# EAGLE board SENTRY Board PCB (EAGLE 9.7.0)
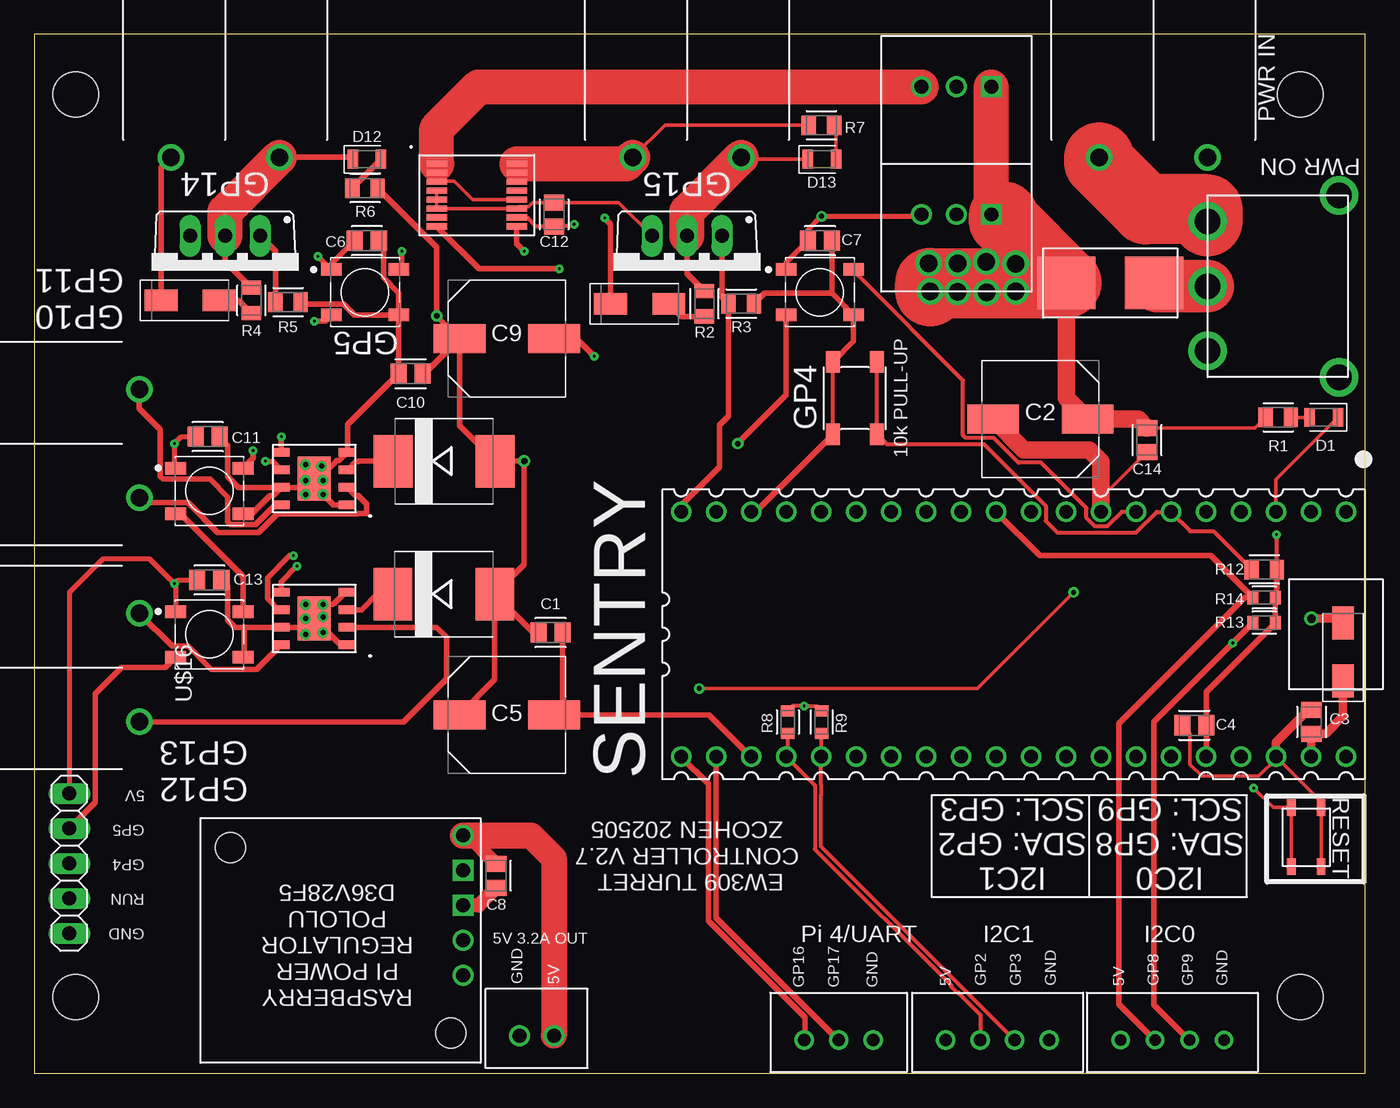
[diagram p0: board, top side]
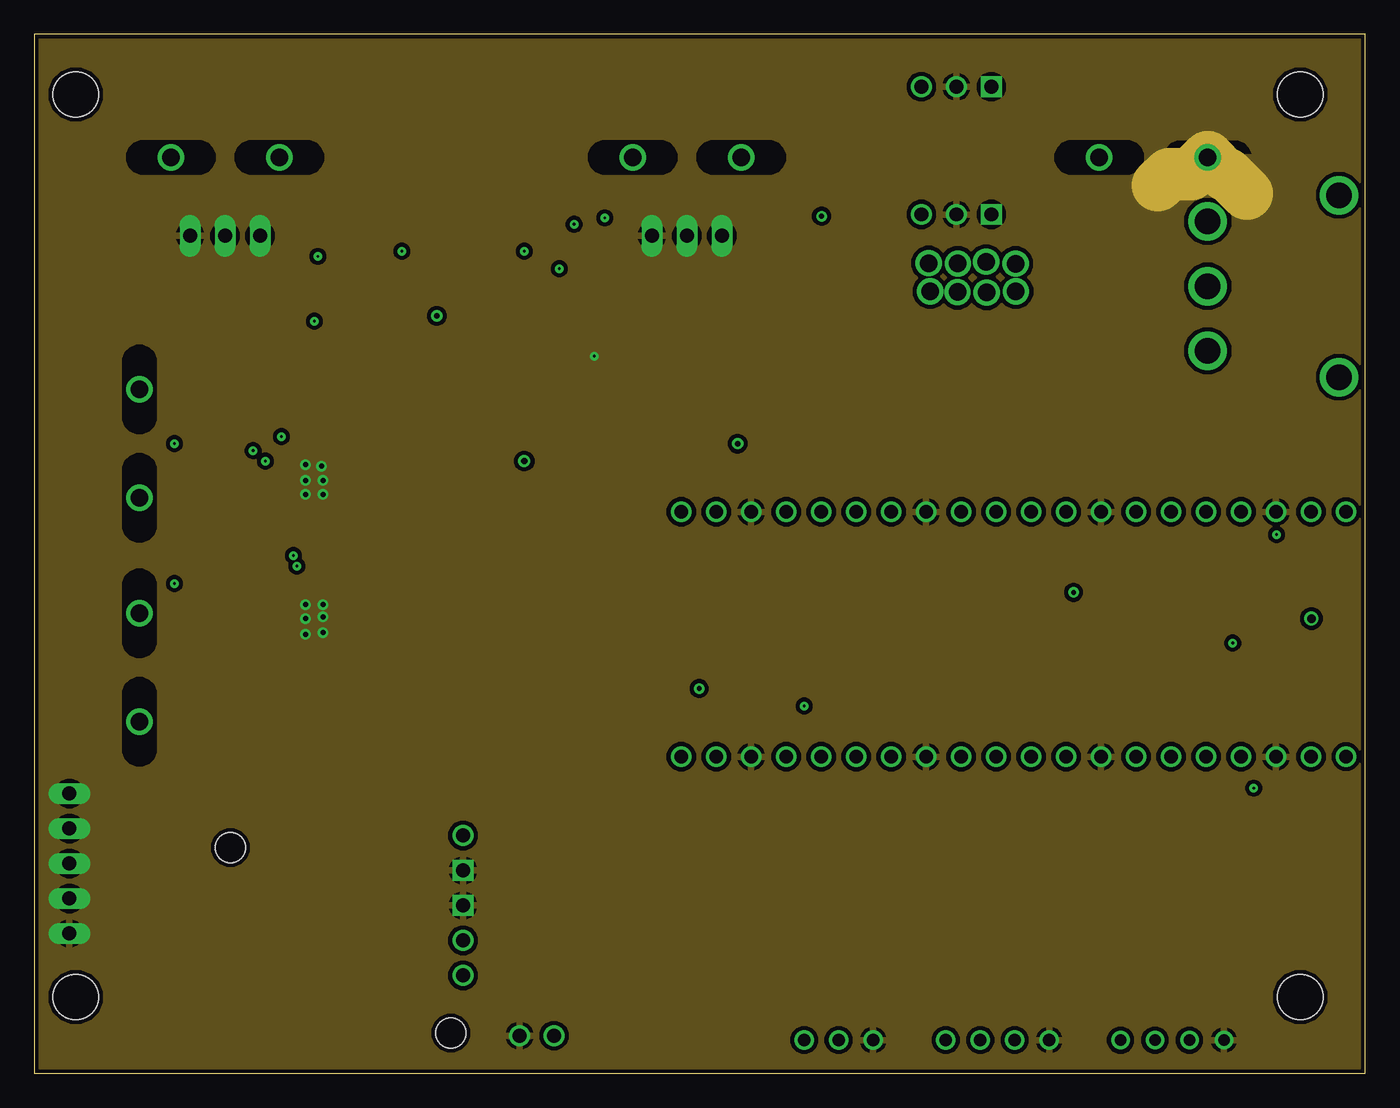
[diagram p1: board, inner layer GROUND PLANE]
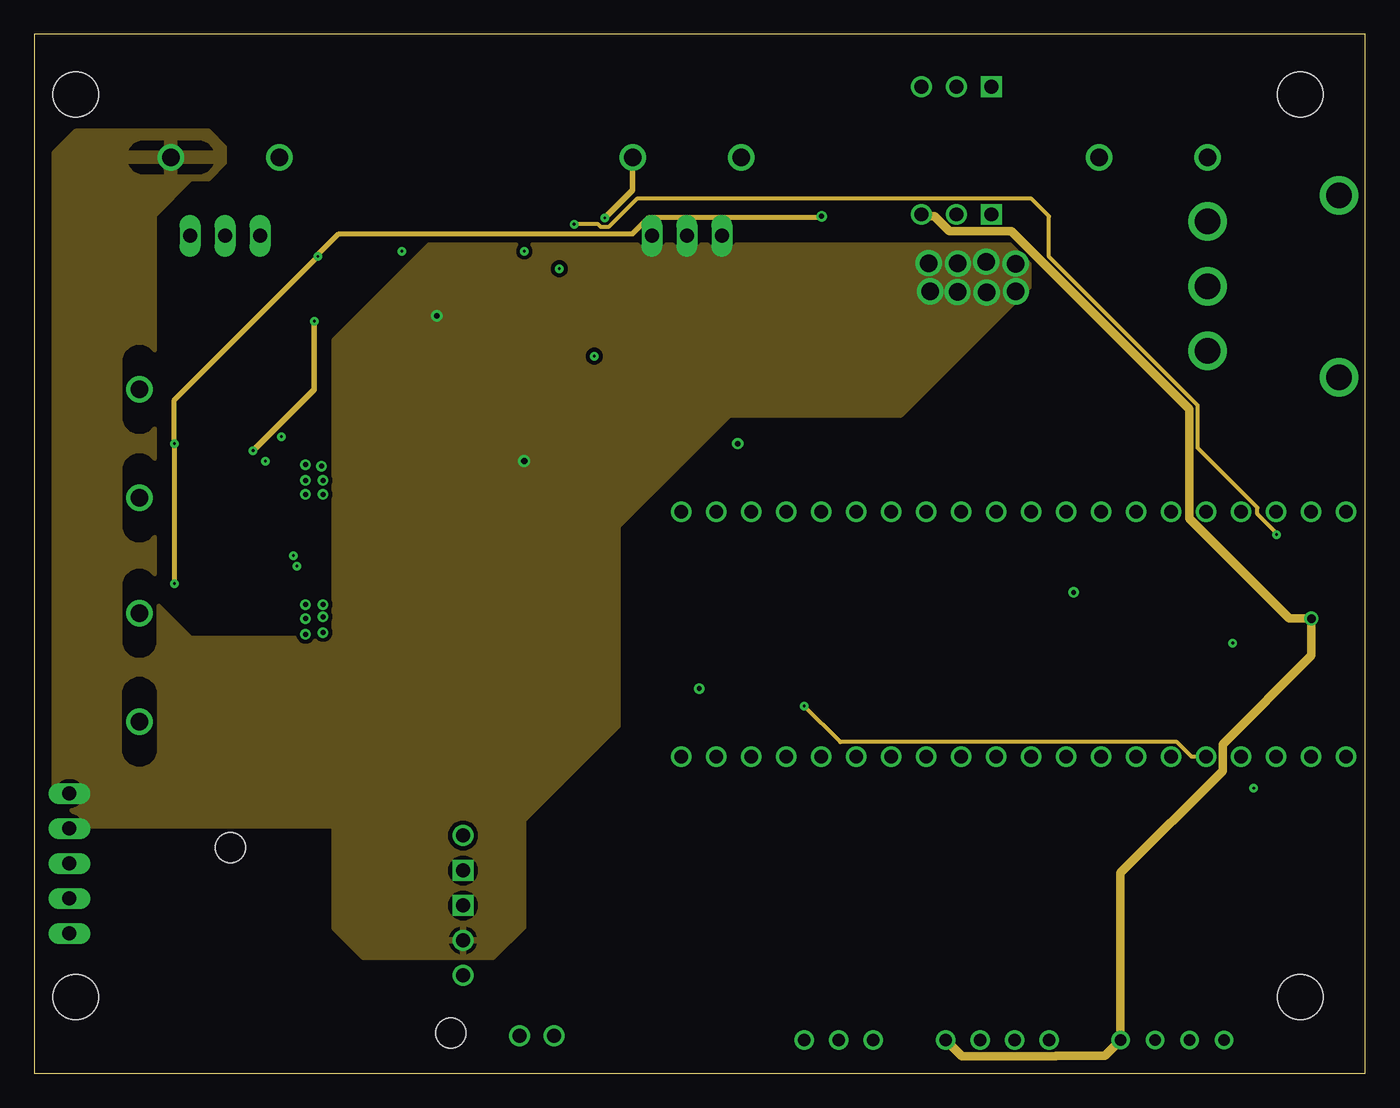
[diagram p2: board, inner layer POWER PLANE]
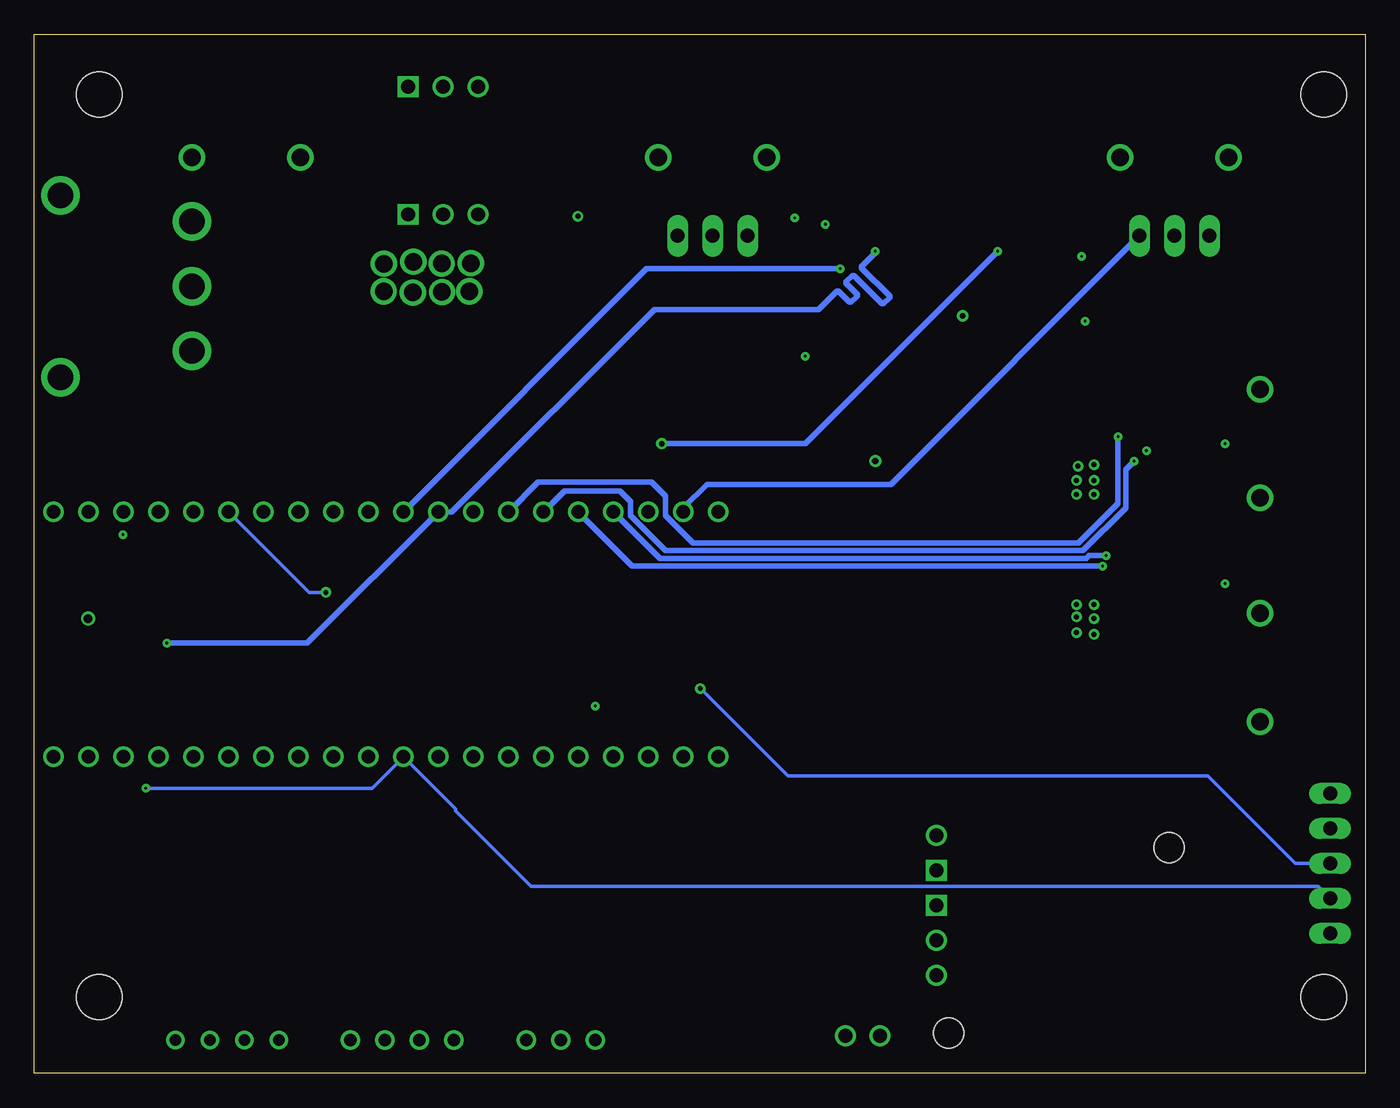
[diagram p3: board, bottom side, seen from below]

Size 96.6 x 75.43 mm. Coordinates in mm from the lower left corner, seen from the top.
Outline: 0,0 96.6,0 96.6,75.43 0,75.43 0,0
Copper layers (1+2*15+16): Top / GROUND PLANE / POWER PLANE / Bottom
Stack-up 4 Layer Stack: Top SilkScreen Epoxy Ink / Top SolderMask SR:Green 0.0254mm Dk 4.3 / Top Surface Finish Lead-Free 0.02mm / Top CuFoil:007 0.035mm / Dielectric-1 Prepreg:001 0.064mm / Dielectric-2 Prepreg:001 0.064mm / GROUND PLANE CuFoil:007 0.035mm / Dielectric-3 Core:066 0.711mm / POWER PLANE CuFoil:007 0.035mm / Dielectric-4 Prepreg:001 0.064mm / Dielectric-5 Prepreg:001 0.064mm / Bottom CuFoil:007 0.035mm / Bottom Surface Finish Lead-Free 0.02mm / Bottom SolderMask SR:Green 0.0254mm Dk 4.3 / Bottom SilkScreen Epoxy Ink
Design rules: minimum copper width 4mil, minimum drill size 6mil, copper clearance wire_polygon to wire_polygon 4mil, copper clearance wire_polygon to pad_smd 4mil, copper clearance wire_polygon to via 8mil, copper clearance pad_smd to pad_smd 6mil, copper clearance pad_smd to via 4mil, copper clearance via to via 4mil, copper clearance smd to pad (same net) 4mil, copper clearance smd to via (same net) 4mil, copper clearance smd to smd (same net) 6mil, dimension clearance 8mil, via restrict clearance 0mil, restrict clearance 0mil, drill distance 8mil, keepout clearance 0mil
Holes 3.3 mm at 91.89,71.07 91.89,5.54 3,5.54 3,71.07

## Footprints (pad centres in the part's own frame; a part is rotated, then mirrored left to right if it is on the bottom)
CAPC2012X110 = smd 1.165 x 1.465: 1 -0.875,0; 2 0.875,0
CAPAE830X1050N = smd 3.764 x 2.115: 1 -3.426,0; 2 3.426,0
LEDC2012X110N_FLAT-R = smd 0.762 x 1.362: A 1.025,0; C -1.025,0
DIOM5226X290N = smd 2.392 x 1.565: 1 -2.108,0; 2 2.108,0
WS2812B = smd 1.5 x 0.9: 1 -2.45,1.65; 2 -2.45,-1.65; 3 2.45,-1.65; 4 2.45,1.65
SMC = smd 2.8 x 3.8: A 3.7,0; C -3.7,0
LEDC2012X110N_FLAT-G = smd 0.762 x 1.362: A 1.025,0; C -1.025,0
LEDC2012X110N_FLAT-B = smd 0.762 x 1.362: A 1.025,0; C -1.025,0
B4B-XH-A = drill 0.9: 1 0,0; 2 2.5,0; 3 5,0; 4 7.5,0
B4B-XH-A' = drill 0.84: 1 0,0; 2 2.5,0; 3 5,0; 4 7.5,0
B2B-XH-A = drill 1: 1 0,0; 2 2.5,0
1X05 = drill 1.016 long: 1 -5.08,0; 2 -2.54,0; 3 0,0; 4 2.54,0; 5 5.08,0
B3B-XH-A = drill 0.9: 1 0,0; 2 2.5,0; 3 5,0
TO220BV = drill 1.016 long: D 0,-2.54; G -2.54,-2.54; S 2.54,-2.54
RESC2012X65 = smd 1.031 x 1.42: 1 -0.919,0; 2 0.919,0
RESC1608X60 = smd 0.799 x 0.974: 1 -0.815,0; 2 0.815,0
PICO-PKG-TH = drill 1: 1 -8.89,24.13; 2 -8.89,21.59; 3 -8.89,19.05; 4 -8.89,16.51; 5 -8.89,13.97; 6 -8.89,11.43; 7 -8.89,8.89; 8 -8.89,6.35; 9 -8.89,3.81; 10 -8.89,1.27; 11 -8.89,-1.27; 12 -8.89,-3.81; 13 -8.89,-6.35; 14 -8.89,-8.89; 15 -8.89,-11.43; 16 -8.89,-13.97; 17 -8.89,-16.51; 18 -8.89,-19.05; 19 -8.89,-21.59; 20 -8.89,-24.13; 21 8.89,-24.13; 22 8.89,-21.59; 23 8.89,-19.05; 24 8.89,-16.51; 25 8.89,-13.97; 26 8.89,-11.43; 27 8.89,-8.89; 28 8.89,-6.35; 29 8.89,-3.81; 30 8.89,-1.27; 31 8.89,1.27; 32 8.89,3.81; 33 8.89,6.35; 34 8.89,8.89; 35 8.89,11.43; 36 8.89,13.97; 37 8.89,16.51; 38 8.89,19.05; 39 8.89,21.59; 40 8.89,24.13
ANDERSONBOARDCONNECTOR = drill 1.27 slot 5.232: GND 3.937,0; PWR -3.937,0
154_OMNI_BLOK_FUSE_HOLDER = smd 4.242 x 3.81: P$1 -3.188,0; P$2 3.188,0
OKI-78SRVERT = drill 1: GND 0,0; OUT 2.54,0 | drill 1 square: IN -2.54,0
DX36V28FX = drill 1.016: EN 6.35,1.27; IN 8.89,1.27; OUT 16.51,1.27 | drill 1.016 square: GND1 13.97,1.27; GND2 11.43,1.27 | hole 2.184: 15.621,18.161; 2.159,2.159
BD62120AEFJ = smd 1.27 x 0.635: P$1 -2.41,1.905; P$2 -2.41,0.635; P$3 -2.41,-0.635; P$4 -2.41,-1.905; P$5 2.41,-1.905; P$6 2.41,-0.635; P$7 2.41,0.635; P$8 2.41,1.905 | smd 2.4 x 3.2: P$9 0,0
SN50SMTR2SWITCH = smd 1.55 x 1: P$1 -2.625,1.6; P$2 -2.625,-1.6; P$3 2.625,1.6; P$4 2.625,-1.6
INA260 = smd 1.5 x 0.45: P$1 -2.54,2.54; P$2 -2.54,1.89; P$3 -2.54,1.24; P$4 -2.54,0.59; P$5 -2.54,-0.06; P$6 -2.54,-0.71; P$7 -2.54,-1.36; P$8 -2.54,-2.01; P$9 3.26,-2.01; P$10 3.26,-1.36; P$11 3.26,-0.71; P$12 3.26,-0.06; P$13 3.26,0.59; P$14 3.26,1.24; P$15 3.26,1.89; P$16 3.26,2.54
TACTILE_SWITCH = smd 1.2 x 0.65: P$1 -2.15,1.075; P$2 -2.15,-1.075; P$3 2.15,1.075; P$4 2.15,-1.075
500SSP3S1M6QEA_SWITCH = drill 1.854: P$1 0,4.699; P$2 0,0; P$3 0,-4.699; P$4 -9.525,-6.604; P$5 -9.525,6.604

## Placement (x,y rotation side)
C1  .1uF  [CAPC2012X110]  37.47,32 0 top
C2  100uF  [CAPAE830X1050N]  73.03,47.5 180 top
C3  1uF  [CAPC2012X110]  92.71,25.52 90 top
C4  .1uF  [CAPC2012X110]  84.2,25.27 180 top
C5  100uF  [CAPAE830X1050N]  34.29,26.04 0 top
C6  .1uF  [CAPC2012X110]  24.13,60.45 0 top
C7  .1uF  [CAPC2012X110]  57.02,60.45 0 top
C8  1uF  [CAPC2012X110]  33.53,14.35 270 top
C9  100uF  [CAPAE830X1050N]  34.29,53.34 0 top
C10  .1uF  [CAPC2012X110]  27.3,50.8 180 top
C11  .1uF  [CAPC2012X110]  12.57,46.23 0 top
C12  .1uF  [CAPC2012X110]  37.72,62.36 90 top
C13  .1uF  [CAPC2012X110]  12.7,35.81 0 top
C14  10uF  [CAPC2012X110]  80.77,45.97 270 top
D1  LED_RED  [LEDC2012X110N_FLAT-R]  93.6,47.62 180 top
D2  DIODE  [DIOM5226X290N]  43.94,55.88 0 top
D3  DIODE  [DIOM5226X290N]  11.3,56.12 0 top
D4  WS2812B  [WS2812B]  12.7,42.29 0 top
D5  WS2812B  [WS2812B]  12.7,31.88 0 top
D6  [SMC]  29.74,44.45 0 top
D7  [SMC]  29.72,34.8 0 top
D8  DIODE  [DIOM5226X290N]  95,30.61 90 top
D12  LED_GREEN  [LEDC2012X110N_FLAT-G]  24.13,66.36 0 top
D13  LED_BLUE  [LEDC2012X110N_FLAT-B]  57.16,66.36 0 top
D14  WS2812B  [WS2812B]  57.02,56.71 0 top
D15  WS2812B  [WS2812B]  24,56.71 0 top
I2C  B4B-XH-A  [B4B-XH-A]  66.17,2.41 0 top
I2C0  B4B-XH-A  [B4B-XH-A']  78.85,2.41 0 top
J1  JST-XH-2PIN  [B2B-XH-A]  37.72,2.74 180 top
JP1  PINHD-1X5  [1X05]  2.54,15.24 270 top
PI  B3B-XH-A  [B3B-XH-A]  55.88,2.41 0 top
Q1  NMOSFET  [TO220BV]  47.37,58.27 180 top
Q2  NMOSFET  [TO220BV]  13.84,58.27 180 top
R1  1K  [RESC2012X65]  90.3,47.62 180 top
R2  10K  [RESC2012X65]  48.64,55.88 270 top
R3  10K  [RESC2012X65]  51.31,55.88 180 top
R4  10K  [RESC2012X65]  15.75,56.12 270 top
R5  10K  [RESC2012X65]  18.41,55.99 180 top
R6  1K  [RESC2012X65]  24,64.26 0 top
R7  1K  [RESC2012X65]  57.13,68.83 180 top
R8  4k7  [RESC1608X60]  54.69,25.5 90 top
R9  4k7  [RESC1608X60]  57.15,25.5 90 top
R12  10K  [RESC2012X65]  89.28,36.58 0 top
R13  4k7  [RESC1608X60]  89.28,32.72 0 top
R14  4k7  [RESC1608X60]  89.28,34.54 0 top
U1  RASPBERRY_PICOTH  [PICO-PKG-TH]  71.08,31.88 270 top
U$1  ANDERSONBOARDCONNECTORHORIZONTAL  [ANDERSONBOARDCONNECTOR]  81.24,66.5 0 top
U$2  5A  [154_OMNI_BLOK_FUSE_HOLDER]  78.11,57.38 0 top
U$3  OKI-78SRVERTICAL  [OKI-78SRVERT]  66.93,62.36 180 top
U$4  ANDERSONBOARDCONNECTORHORIZONTAL  [ANDERSONBOARDCONNECTOR]  47.37,66.5 0 top
U$5  ANDERSONBOARDCONNECTORHORIZONTAL  [ANDERSONBOARDCONNECTOR]  13.84,66.5 0 top
U$7  DX36V28FX  [DX36V28FX]  32.38,0.76 90 top
U$8  OKI-78SRVERTICAL  [OKI-78SRVERT]  66.93,71.63 180 top
U$9  BD62120AEFJ  [BD62120AEFJ]  20.32,33.02 180 top
U$10  SN50SMTR2SWITCH  [SN50SMTR2SWITCH]  59.56,49.02 90 top
U$11  BD62120AEFJ  [BD62120AEFJ]  20.32,43.18 180 top
U$12  INA260  [INA260]  31.75,63.5 0 top
U$13  TACTILE_SWITCH  [TACTILE_SWITCH]  92.33,17.14 270 top
U$14  500SSP3S1M6QEA_SWITCH  [500SSP3S1M6QEA_SWITCH]  85.18,57.15 180 top
U$15  ANDERSONBOARDCONNECTORHORIZONTAL  [ANDERSONBOARDCONNECTOR]  7.62,45.72 90 top
U$16  ANDERSONBOARDCONNECTORHORIZONTAL  [ANDERSONBOARDCONNECTOR]  7.62,29.46 90 top

## Library data of the parts
C1 C4 C6 C7 C10-C14 = Capacitor; CATEGORY: Capacitor; PACKAGE_SIZE: 0805; PACKAGE_TYPE: SMD; SUBCATEGORY: Ceramic Capacitors; TYPE: MLCC
C2 C5 C9 = Capacitor; CATEGORY: Capacitor; PACKAGE_SIZE: 8.5MM; PACKAGE_TYPE: SMD; SUBCATEGORY: Aluminum Electrolytic Capacitors; TYPE: Radial Can
C3 C8 = Capacitor; CATEGORY: Capacitor
D1 = LED; CATEGORY: LED; COLOR: RED; DESCRIPTION: CHIP LED FLAT; SUB-CATEGORY: CHIP; TYPE: FLAT_TOP
D2 D3 D8 = Diode; CATEGORY: Diode; SUB-CATEGORY: Rectifier
D4 D5 D14 D15 = LED; CATEGORY: LED; COLOR: RGB; DESCRIPTION: LED integrated light source; MANUFACTURER: Worldsemi; MPN: WS2812B; OPERATING_TEMP: -25 ℃ to +80℃(TJ); PART_STATUS: Active; SUB_CATEGORY: RGB
D6 D7 = diode
D12 = LED; CATEGORY: LED; COLOR: GREEN; DESCRIPTION: CHIP LED FLAT; SUB-CATEGORY: CHIP; TYPE: FLAT_TOP
D13 = LED; CATEGORY: LED; COLOR: BLUE; DESCRIPTION: CHIP LED FLAT; SUB-CATEGORY: CHIP; TYPE: FLAT_TOP
I2C = Connector; CATEGORY: Connectors; DATASHEET: https://www.jst-mfg.com/product/pdf/eng/eXH.pdf; DESCRIPTION: Connector Header Through Hole 4 position 0.098" (2.50mm); MANUFACTURER: JST Sales America Inc.; MPN: B4B-XH-A; OPERATING_TEMPERATURE: -25°C ~ 85°C; PACKAGE_SIZE: NA; PACKAGE_TYPE: Through Hole; PART_STATUS: Active; PITCH: 0.098" (2.50mm); ROHS: Compliant; SERIES: XH; SUBCATEGORY: Rectangular Connectors; TYPE: Male Headers
I2C0 = Connector; CATEGORY: Header; DSECRIPTION: Connector Header Through Hole 4 position 0.098" (2.50mm); MANUFACTURER: JST Sales America Inc.; MPN: B4B-XH-A(LF)(SN); OPERATING_TEMPERATURE: -25 C to 85 C; PART_STATUS: ACTIVE; PITCH: 0.098" (2.50mm); ROHS_COMPLIANCE: ROHS3 Compliant; SERIES: XH; SUB_CATEGORY: Rectangular Connectors; TYPE: Header, Male Pin, Board to Cable/Wire, Through Hole
J1 = Connector; CATEGORY: Connectors; DATASHEET: https://www.jst-mfg.com/product/pdf/eng/eXH.pdf; DESCRIPTION: Connector Header Through Hole 2 position 0.098" (2.50mm); MANUFACTURER: JST Sales America Inc.; MPN: B2B-XH-A; OPERATING_TEMPERATURE: -25°C ~ 85°C; PACKAGE_SIZE: NA; PACKAGE_TYPE: Through Hole; PART_STATUS: Active; PITCH: 0.098" (2.50mm); ROHS: Compliant; SERIES: XH; SUBCATEGORY: Rectangular Connectors; TYPE: Male Headers
JP1 = Connector; CATEGORY: Connectors; DESCRIPTION: Header-Straight-5 Position; PACKAGE_TYPE: Through Hole; PITCH: 0.100" (2.54mm); SUBCATEGORY: Headers; TYPE: Male Pins
PI = Connector; CATEGORY: Connectors; DATASHEET: https://www.jst-mfg.com/product/pdf/eng/eXH.pdf; DESCRIPTION: Connector Header Through Hole 3 position 0.098" (2.50mm); MANUFACTURER: JST Sales America Inc.; MPN: B3B-XH-A; OPERATING_TEMPERATURE: -25°C ~ 85°C; PACKAGE_SIZE: NA; PACKAGE_TYPE: Through Hole; PART_STATUS: Active; PITCH: 0.098" (2.50mm); ROHS: Compliant; SERIES: XH; SUBCATEGORY: Rectangular Connectors; TYPE: Male Headers
Q1 Q2 = Transistor; CATEGORY: Transistor; SUB-CATEGORY: MOSFET; TYPE: N-Channel
R1-R7 R12 = Resistor; CATEGORY: Resistors; DESCRIPTION: Chip Resistor 2.00 X 1.25 X 0.65 mm body 0805(2012-METRIC) Package; PACKAGE_SIZE: 0805; PACKAGE_TYPE: SMD
R8 R9 R13 R14 = Resistor; CATEGORY: Resistors; DESCRIPTION: Chip Resistor 1.60 X 0.82 X 0.60 mm body 0603(1608-METRIC) Package; PACKAGE_SIZE: 0603; PACKAGE_TYPE: SMD
U1 U$1-U$5 U$7-U$16 = CohenLibrary

## Nets
11: U$14.P$1
+3.3V [PWRLOW]: C4.1 C12.1 R8.2 R9.2 R12.2 R13.2 R14.2 U1.36 U$12.P$10
+5V [PWRLOW]: C6.1 C7.1 C11.1 C13.1 D4.1 D5.1 D8.2 D14.1 D15.1 I2C0.1 I2C.1 JP1.1 U$3.OUT
+5V_RPI: C8.1 J1.1 U$7.OUT
+5VMOT [PWR]: U$8.OUT U$12.P$1 U$12.P$2 U$12.P$3 U$12.P$12
+12V [PWR]: C1.1 C2.1 C5.1 C9.1 C10.1 C14.1 D3.1 D6.A D7.A R1.2 R6.2 U$2.P$1 U$3.IN U$5.PWR U$7.IN U$8.IN
DOUT: D5.2 JP1.2
GND [GND]: C1.2 C2.2 C3.2 C4.2 C5.2 C6.2 C7.2 C8.2 C9.2 C10.2 C11.2 C12.2 C13.2 C14.2 D1.C D4.3 D5.3 D14.3 D15.3 I2C0.4 I2C.4 J1.2 JP1.5 PI.3 Q1.S Q2.S R3.1 R5.1 U1.3 U1.8 U1.13 U1.18 U1.23 U1.28 U1.33 U1.38 U$1.GND U$3.GND U$7.GND1 U$7.GND2 U$8.GND U$9.P$1 U$9.P$4 U$9.P$7 U$9.P$9 U$10.P$1 U$10.P$3 U$11.P$1 U$11.P$4 U$11.P$7 U$11.P$9 U$12.P$4 U$12.P$5 U$12.P$6 U$12.P$11 U$13.P$1 U$13.P$3
GP4_BUTTON: JP1.3 R12.1 U1.6 U$10.P$2 U$10.P$4
GP5_WS2812B: D14.4 U1.7
GP10_PAN: U1.14 U$11.P$5
GP11_PAN: U1.15 U$11.P$6
GP12_TILT: U1.16 U$9.P$5
GP13_TILT: U1.17 U$9.P$6
GP14_FEED: Q2.G R5.2 U1.19
GP15_FLY: Q1.G R3.2 U1.20
GP16_PI4_TX: PI.1 U1.21
GP17_PI4_RX: PI.2 U1.22
I2C0_N: I2C0.2 R14.1 U1.11 U$12.P$8
I2C0_P: I2C0.3 R13.1 U1.12 U$12.P$9
I2C1_N: I2C.2 R8.1 U1.24
I2C1_P: I2C.3 R9.1 U1.25
N$1 [SIGNAL]: U$1.PWR U$14.P$3
N$2 [SIGNAL]: D1.A R1.1
N$3 [PWR]: D13.C Q1.D R2.1 U$4.GND
N$4 [SIGNAL]: D2.2 R2.2
N$5: D14.2 D15.4
N$6: U1.32
N$7 [SIGNAL]: D3.2 R4.2
N$8 [PWRLOW]: C3.1 D8.1 U1.39
N$9 [PWR]: D2.1 R7.2 U$4.PWR U$12.P$14 U$12.P$15 U$12.P$16
N$10: U1.31
N$11 [PWR]: D12.C Q2.D R4.1 U$5.GND
N$12: U$11.P$2 U$15.PWR
N$13: U$11.P$8 U$15.GND
N$14: D4.2 D5.4
N$15: D4.4 D15.2
N$16: U$9.P$2 U$16.PWR
N$17: U$9.P$8 U$16.GND
N$18: D13.A R7.1
N$19: D12.A R6.1
N$20 [PWR]: D6.C U$11.P$3
N$21 [PWR]: D7.C U$9.P$3
N$23 [SIGNAL]: U$2.P$2 U$14.P$2
N$24: U1.4
N$25: U1.5
N$46: U1.34
RUN: JP1.4 U1.30 U$13.P$2 U$13.P$4

## Tracks (layer width: path | path; a pad name or v marks a point on that pad's centre or on a via)
+3.3V  (via drill 0.2)
  Top 0.305: R12.2 90.2,39.09 v90.17,39.12 | v39.18,61.65 39.06,61.53 37.77,61.53 C12.1 36.42,61.48 35.76,62.15 U$12.P$10 | R9.2 56.8,26.67 v55.88,26.67 55.85,26.7 55.07,26.7 R8.2
  Top 0.406: R14.2 90.2,34.65 R12.2 | R14.2 R13.2 85.08,27.7 C4.1 85.08,23.01 U1.36 | R14.2 90.17,34.62
  POWER PLANE 0.305: v90.17,39.12 90.17,39.23 88.78,40.62 88.78,41.08 84.45,45.4 84.45,48.49 73.66,59.28 73.66,62.23 72.39,63.5 43.73,63.5 41.68,61.44 41.13,61.44 40.92,61.65 v39.18,61.65 | U1.36 84.01,22.99 82.95,24.05 58.5,24.05 v55.88,26.67
  Bottom 0.305: 39.12,61.47 39.18,61.53 v39.18,61.65
+5V  (via drill 0.2, 0.36, 0.61)
  Top 0.356: U$3.OUT 64.26,62.23 v57.15,62.23 56.15,61.23 C7.1 54.57,58.88 D14.1 | v20.57,59.31 20.61,59.31 D15.1 21.55,58.75 C6.1 | C11.1 10.67,46.23 v10.16,45.72 10.16,44.03 D4.1 | v10.16,35.56 10.41,35.81 C13.1 | v10.16,35.56 10.25,35.47 D5.1 | v10.16,35.56 8.38,37.34 4.95,37.34 2.54,34.92 JP1.1
  Top 0.508: I2C0.1 78.74,2.52
  Top 0.61: v92.71,33.02 94.69,33.02 D8.2
  POWER PLANE 0.356: v57.15,62.23 57.08,62.16 44.63,62.16 43.43,60.96 22.1,60.96 20.57,59.44 v20.57,59.31 10.16,48.9 v10.16,45.72 v10.16,35.56
  POWER PLANE 0.61: U$3.OUT 64.39,62.23 65.34,62.23 66.43,61.15 70.93,61.15 83.84,48.24 83.84,40.27 91.09,33.02 v92.71,33.02 92.71,30.33 86.26,23.88 86.26,21.98 78.85,14.56 I2C0.1 77.71,1.27 74.17,1.27 74.15,1.25 67.33,1.25 I2C.1
+5V_RPI
  Top 1.016: C8.1 31.48,17.27 U$7.OUT
  Top 1.905: U$7.OUT 36.07,17.27 37.72,15.62 J1.1
+5VMOT
  Top 0.254: U$12.P$3 29.21,64.77 | 29.21,64.77 U$12.P$2 U$12.P$1 | 29.21,64.77 30.48,64.77 31.81,63.44 U$12.P$12
  Top 2.54: U$12.P$1 29.21,68.58 32.26,71.63 U$8.OUT
+12V  (via drill 0.41, 0.46, 1.27)
  Top 0.254: C14.1 88.6,46.85 R1.2
  Top 0.305: 70.37,61.93 70.36,61.94 70.36,62.36
  Top 0.406: D3.1 9.2,65.79 U$5.PWR | D7.A 35.56,36.94 v35.56,44.45 D6.A 30.86,47.02 C9.1 | C5.1 33.42,28.59 D7.A | R6.2 29.21,59.97 v29.21,54.99 C9.1 | C10.1 28.32,50.8 C9.1 | C1.1 36.21,32 D7.A
  Top 1.27: U$2.P$1 74.92,49.03 C2.1 80.12,47.5 C14.1
  Top 2.54: U$2.P$1 74.92,57.8 | 70.36,62.36 U$3.IN U$8.IN
  Top 5.08: 70.37,62.23 70.37,61.93 U$2.P$1 65.02,57.38 v65.02,56.77
  other vias: 69.09,58.93 71.25,56.77 64.92,58.82 67.01,56.72 69.13,56.69 71.23,58.78 67.04,58.8
  pour POWER PLANE (isolate 0.305): 28.57,60.33 72.39,60.33 72.39,57.02 62.99,47.62 50.55,47.62 42.55,39.62 42.55,25.15 35.69,18.29 35.69,10.54 33.4,8.26 23.75,8.26 21.59,10.41 21.59,53.34
  pour POWER PLANE (isolate 0.305): 13.97,66.04 13.97,67.31 12.7,68.58 2.92,68.58 1.27,66.93 1.27,20.32 3.81,17.78 22.86,17.78 22.86,31.75 11.43,31.75 8.89,34.29 8.89,62.23 11.43,64.77 12.7,64.77
DOUT
  Top 0.406: D5.2 9.49,29.46 6.35,29.46 4.42,27.53 4.42,19.66 JP1.2
GND  (via drill 0.2, 0.36)
  Top 0.254: U1.3 90.13,43.13 D1.C | U1.8 77.43,41.76 C14.2 | U$12.P$4 U$12.P$5 U$12.P$6 U$12.P$11 35.16,62.94 35.88,62.94 36.17,63.23 C12.2 42.41,63.23 Q1.S | U1.38 90.21,22.9 | 90.21,22.9 93.4,19.71 U$13.P$1 U$13.P$3 | C4.2 83.89,24.71 83.89,22.43 84.73,21.59 88.9,21.59 90.21,22.9
  Top 0.305: U$10.P$1 U$10.P$3 | U$11.P$9 20.64,43.18 | v19.68,43.05 20.51,43.05 21.75,44.29 | v19.68,33.02 20.8,34.13 21.75,34.13 | U$9.P$9 20.45,33.15 v20.95,33.15
  Top 0.406: U1.18 52.33,40.77 U$10.P$1 | U$10.P$3 59.47,53.16 D14.3 57.9,56.64 | 57.9,56.64 C7.2 | R3.1 52.98,56.64 57.9,56.64 | D15.3 23.26,55.06 22.45,55.87 19.46,55.87 R5.1 | C6.2 25.35,60.11 25.35,57.77 26.45,56.66 D15.3 | D15.3 26.43,55.04 C10.2 22.73,47.1 U$11.P$4 22.13,44.49 21.95,44.49 21.75,44.29 20.64,43.18 | U$11.P$7 19.68,42.55 U$11.P$9 | D4.3 15.82,40.64 17.13,41.95 17.31,41.95 U$11.P$7 | U$11.P$7 14.84,42.55 14.04,43.34 14.04,45.63 C11.2 | C13.2 14.04,35.34 14.04,32.93 14.59,32.38 15.24,32.38 | 15.24,32.38 U$9.P$7 19.68,32.38 U$9.P$9 22.23,31.11 U$9.P$1 | D5.3 15.24,30.32 15.24,32.38 | U$9.P$4 22.55,34.92 21.75,34.13 21.66,34.04 v20.95,34.04 | U$11.P$1 21.72,41.27 v20.95,42.04 | C5.2 38.1,26.04 | 38.1,26.04 48.98,26.04 U1.23 | 38.1,26.04 38.34,26.27 C1.2 | C9.2 39.37,53.34 v40.64,52.07
  Top 0.61: U1.38 90.13,24.03 92.61,26.5 C3.2
  Top 1.016: C8.2 32.24,12.19 U$7.GND2
  Top 1.27: U1.8 77.43,44.42 76.58,45.27 71.83,45.27 C2.2
  GROUND PLANE 3.81: 81.57,64.48 82.39,65.3 83.97,65.3 U$1.GND 86.38,65.3 86.61,65.3 88.02,63.89
  other vias: 19.68,44.2 20.95,43.05 19.68,42.04 19.68,34.04 19.68,31.88 20.95,32 20.84,44.08
  pour GROUND PLANE (isolate 0.305): 96.52,75.95 0,75.95 0,0 96.52,0
GP4_BUTTON  (via drill 0.35)
  Top 0.254: v75.44,34.92 68.45,27.94 v48.26,27.94
  Top 0.305: U$10.P$4 U$10.P$2 61.88,45.68 68.94,45.68 73.41,41.21 73.41,40.12 74.28,39.25 79.95,39.25 81.47,40.77 U1.6 83.91,39.37 85.57,39.37 R12.1
  Bottom 0.254: U1.6 76.67,34.92 v75.44,34.92 | v48.26,27.94 41.91,21.59 11.43,21.59 5.08,15.24 JP1.3
GP5_WS2812B
  Top 0.305: U1.7 78.93,40.77 77.87,39.71 76.99,39.71 76.37,40.33 76.37,41.04 73.08,44.33 71.44,44.33 69.64,46.14 67.59,46.14 67.42,46.31 67.42,50.31 59.82,57.91 59.82,58.02 D14.4
GP10_PAN  (via drill 0.2)
  Top 0.406: U$11.P$5 17.91,46.21 v17.93,46.23
  Bottom 0.406: v17.93,46.23 17.93,41.38 20.8,38.51 48.8,38.51 50.8,40.51 50.8,41.91 51.82,42.93 60.03,42.93 U1.14
GP11_PAN  (via drill 0.2)
  Top 0.406: U$11.P$6 17.31,44.41 16.8,44.41 v16.76,44.45
  Bottom 0.406: v16.76,44.45 17.37,43.84 17.37,41.05 20.47,37.95 50.78,37.95 53.34,40.51 53.34,41.53 54.1,42.29 58.13,42.29 U1.15
GP12_TILT  (via drill 0.2)
  Top 0.406: U$9.P$5 17.91,35.69 v19.05,36.83
  Bottom 0.305: U1.16 57.15,40.77
  Bottom 0.406: v19.05,36.83 53.21,36.83 57.15,40.77
GP13_TILT  (via drill 0.2)
  Top 0.406: U$9.P$6 17.73,33.66 16.92,34.46 16.92,35.97 18.54,37.59 v18.8,37.59
  Bottom 0.406: v18.8,37.59 20.04,37.59 20.24,37.39 51.19,37.39 U1.17
GP14_FEED
  Top 0.406: R5.2 17.5,59.7 Q2.G
  Bottom 0.406: Q2.G 34.43,42.77 47.79,42.77 49.49,41.07 U1.19
GP15_FLY
  Top 0.406: Q1.G 49.91,56.36 R3.2 50.39,47.73 49.73,47.07 49.73,44.02 46.95,41.24 U1.20
GP16_PI4_TX
  Top 0.406: U1.21 48.93,21.01 48.93,11.07 55.92,4.08 55.92,2.45 PI.1
GP17_PI4_RX
  Top 0.406: U1.22 49.49,11.3 PI.2
I2C0_N  (via drill 0.2)
  Top 0.406: I2C0.2 78.74,5.02 78.74,25.4 87.88,34.54 R14.1 85.42,37.59 72.99,37.59 U1.11 | U$12.P$8 32.28,58.42 v38.1,58.42
  Bottom 0.406: v38.1,58.42 52.16,58.42 U1.11
I2C0_P  (via drill 0.2)
  Top 0.406: I2C0.3 81.28,4.98 81.28,25.53 v86.99,31.25 R13.1 | U$12.P$9 35.01,60.24 v35.56,59.69
  Bottom 0.406: v86.99,31.25 v86.99,31.24 | v86.99,31.24 | v86.99,31.24 76.8,31.24 U1.12 66.3,40.77 51.6,55.47 39.67,55.47 38.34,56.8 38.23,56.8 37.42,55.99 37.31,55.99 36.86,56.44 36.86,56.55 37.67,57.36 37.67,57.47 37.22,57.92 37.12,57.92 35.07,55.87 34.96,55.87 34.51,56.32 34.51,56.43 36.56,58.47 36.56,58.58 35.56,59.58 v35.56,59.69
I2C1_N
  Top 0.305: U1.24 54.65,22.9 | 54.65,22.9 56.65,20.9 56.65,16.28 66.56,6.38 66.56,6.3 67,5.85 67.08,5.85 68.67,4.27 I2C.2 | 54.65,22.9 54.69,22.94 R8.1
I2C1_P
  Top 0.305: I2C.3 57.11,16.47 57.11,20.22 57.13,20.24 57.13,20.91 57.11,20.93 57.11,22.86 | 57.11,22.86 U1.25 | 57.11,22.86 57.15,22.9 R9.1
N$1
  Top 5.08: U$14.P$3 85.18,62.74 80.68,62.74 77.3,66.12 U$1.PWR
N$2
  Top 0.254: R1.1 D1.A
N$3
  Top 0.254: D13.C 51.45,66.36 U$4.GND
  Top 0.406: R2.1 47.37,58.07 Q1.D
  Top 2.54: Q1.D 47.37,62.57 U$4.GND
N$4
  Top 0.406: D2.2 46.97,54.96 R2.2
N$5  (via drill 0.2, 0.41)
  Top 0.406: v51.05,45.72 54.57,49.24 D14.2 | D15.4 26.67,58.58 v26.67,59.69
  Bottom 0.406: v26.67,59.69 40.64,45.72 v51.05,45.72
N$7
  Top 0.406: D3.2 14.83,56.12 R4.2
N$8
  Top 0.61: D8.1 95,25.91 93.73,24.64 C3.1 92.71,23.03 U1.39
N$9  (via drill 0.2)
  Top 0.254: U$12.P$14 U$12.P$15 U$12.P$16 | U$4.PWR 45.76,68.83 R7.2
  Top 0.406: v41.4,62.1 41.83,61.67 D2.1
  Top 2.54: U$12.P$16 42.97,66.04 U$4.PWR
  POWER PLANE 0.406: v41.4,62.1 43.43,64.14 U$4.PWR
N$11
  Top 0.406: R4.1 13.84,58.95 Q2.D | U$5.GND 22.96,66.5 D12.C
  Top 2.54: Q2.D 13.84,62.57 U$5.GND
N$12
  Top 0.406: U$15.PWR 7.96,41.45 11.15,41.45 13.32,39.28 16.28,39.28 17.6,40.6 23.51,40.6 23.55,40.64 24.13,40.64 24.13,41.33 23.51,41.95 23.33,41.95 U$11.P$2
N$13
  Top 0.406: U$15.GND 7.62,48.26 9.14,46.74 9.14,43.34 9.35,43.13 12.74,43.13 14.04,41.84 14.04,40.04 14.25,39.84 16.05,39.84 17.49,41.27 U$11.P$8
N$14
  Top 0.406: D5.4 15.15,36.06 10.57,40.64 D4.2
N$15  (via drill 0.2)
  Top 0.406: v20.32,54.61 21.1,54.61 D15.2 | D4.4 15.88,44.67 v15.88,45.21
  POWER PLANE 0.406: v15.88,45.21 20.32,49.66 v20.32,54.61
N$16
  Top 0.406: U$16.PWR 26.8,25.53 29.91,28.64 29.91,31.69 29.21,32.38 U$9.P$2
N$17
  Top 0.406: U$9.P$8 16.13,29.34 12.84,29.34 11.15,31.03 9.99,31.03 U$16.GND
N$18
  Top 0.254: R7.1 58.19,68.7 D13.A
N$19
  Top 0.406: R6.1 23.08,64.29 D12.A
N$20
  Top 0.406: U$11.P$3 23.33,44.41 23.51,44.41 23.55,44.45 D6.C
N$21
  Top 0.406: U$9.P$3 23.75,33.66 24.89,34.8 D7.C
N$23
  Top 2.54: 81.53,57.15 U$2.P$2
  Top 3.81: 81.53,57.15 U$14.P$2
RUN  (via drill 0.2)
  Top 0.254: U$13.P$4 U$13.P$2 89.92,19.3 v88.52,20.7
  Bottom 0.254: v88.52,20.7 72.1,20.7 U1.30 66.04,19.22 66.04,19.05 60.55,13.56 3.4,13.56 JP1.4

## Text on the board
SilkscreenTop: PWR IN | PWR ON | GP14 | GP15 | GP10 / GP11 | GP5 | GP4 | 10k PULL-UP | SENTRY | GP12 / GP13 | 5V | RESET | GP5 | I2C1 / SDA: GP2 / SCL: GP3 | I2C0 / SDA: GP8 / SCL: GP9 | GP4 | EW309 TURRET / CONTROLLER V2.7 / ZCOHEN 202505 | RUN | GND | Pi 4/UART | I2C1 | I2C0 | RASPBERRY / PI POWER / REGULATOR / POLOLU / D36V28F5 | 5V 3.2A OUT | GND | 5V | GP16 | GP17 | GND | 5V | GP2 | GP3 | GND | 5V | GP8 | GP9 | GND